# Altium PCB LED_1.PcbDoc
Units mm, origin at the board's own origin, x right, y up, seen from the top; angles counter-clockwise.
Board outline 79 x 35 mm, 2 copper layers (Top Layer, Bottom Layer); 29 components, 29 nets, 80 pads, 2 vias.
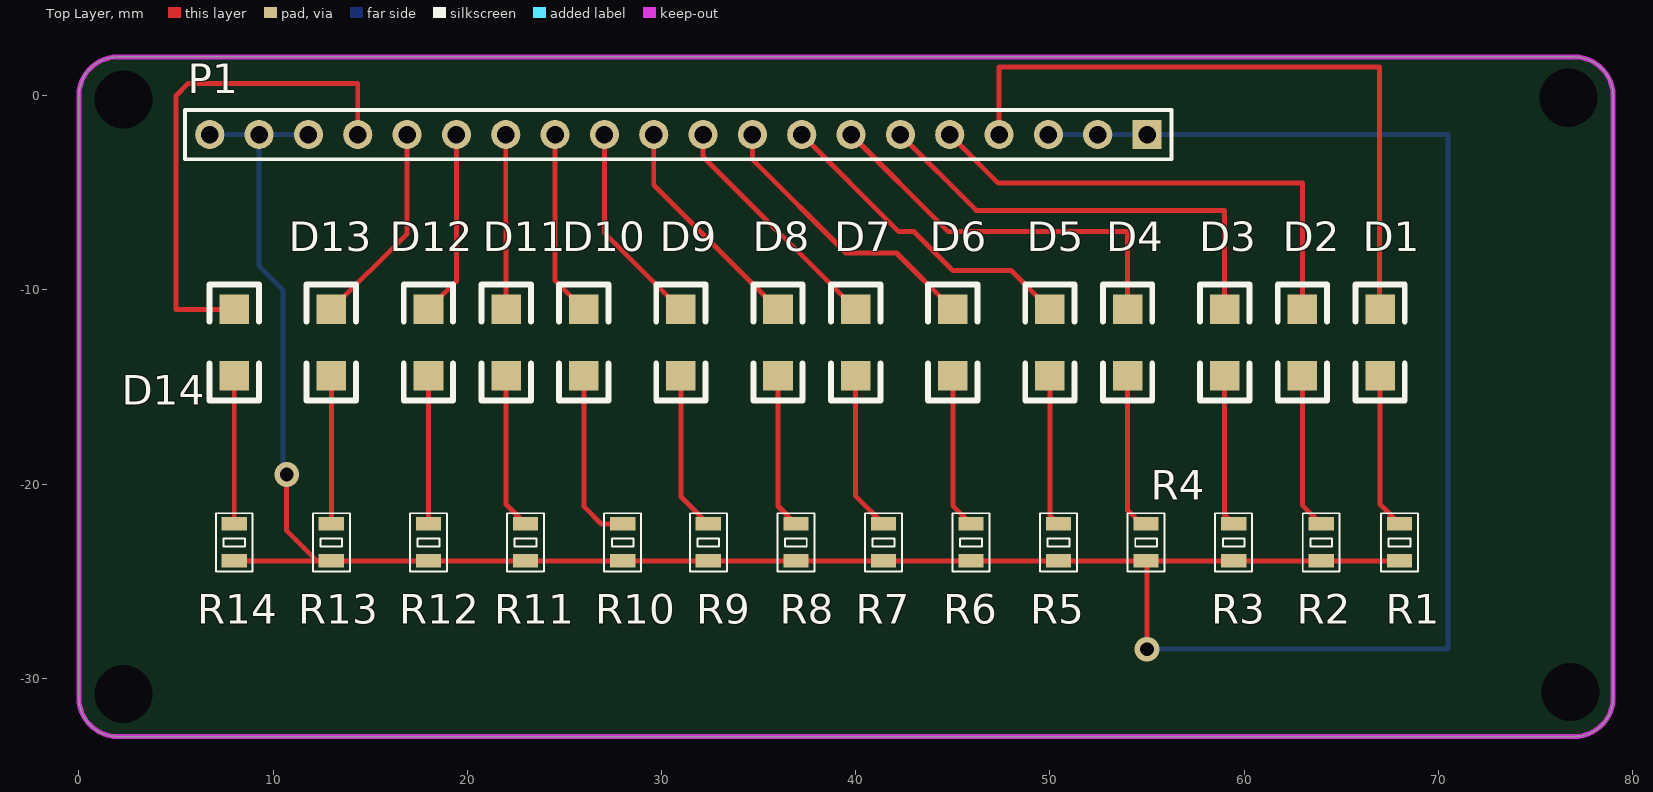
[diagram p0: Top Layer view]
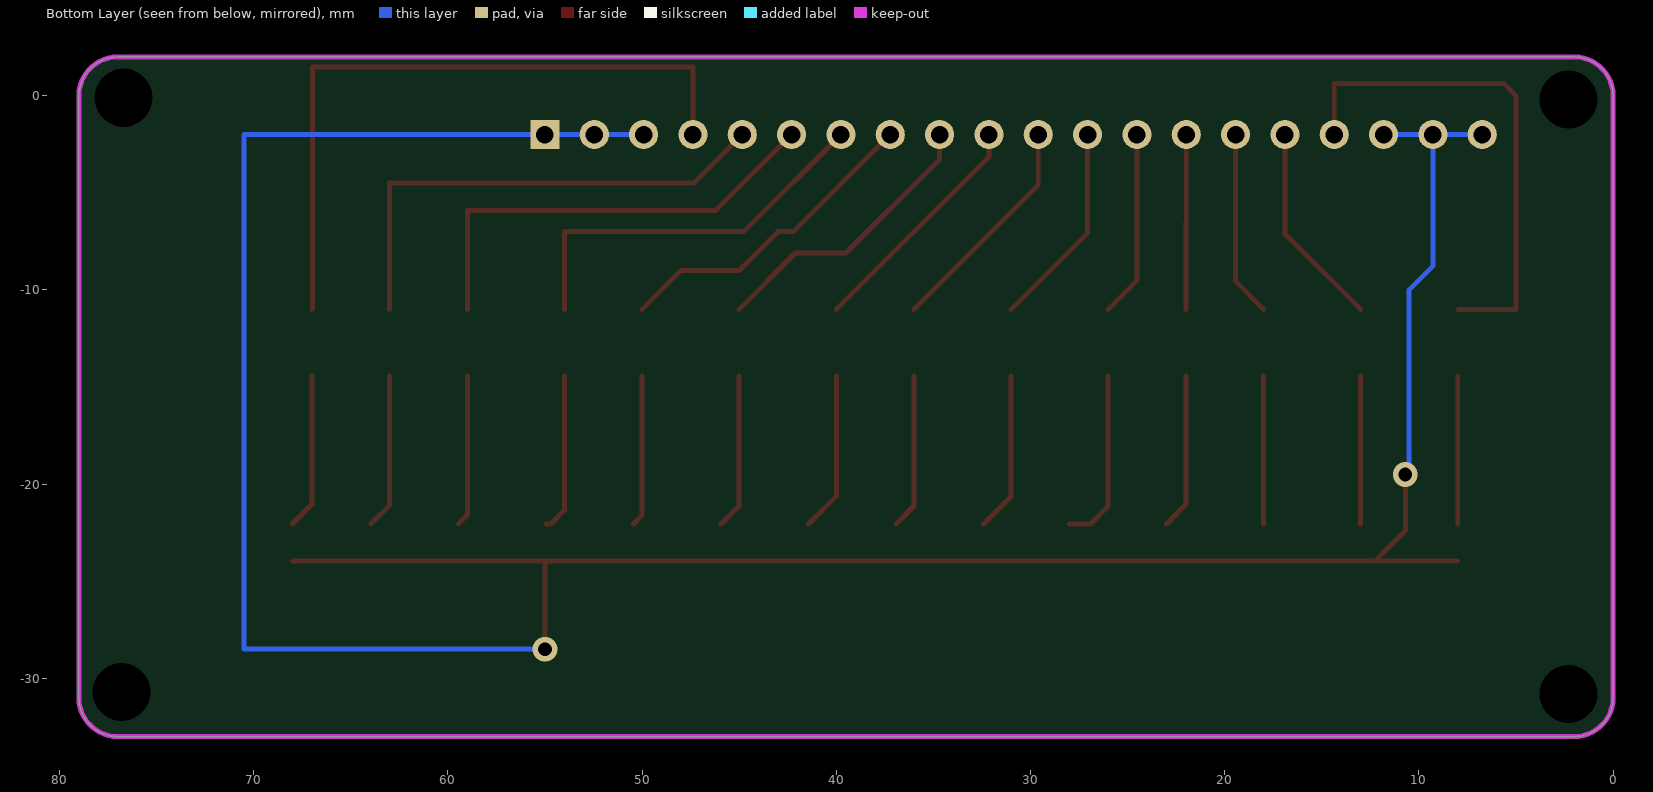
[diagram p1: Bottom Layer view, seen from below]

## Layer stack, top to bottom
Top Layer: signal copper 0.0356
Dielectric: dielectric 0.32, FR-4, Dk 4.8
Bottom Layer: signal copper 0.0356

## Board outline
0,-31 0,0 cw(c2,0) 2,2 77,2 cw(c77,0) 79,0 79,-31 cw(c77,-31) 77,-33 2,-33 cw(c2,-31)

## Design rules (kind name [scope] priority, off if disabled: settings)
Clearance [All] p1: gap=0.254
PolygonConnect [All] p1: connectstyle=Relief reliefconductorwidth=0.254 reliefentries=4 polygonreliefangle="90 Angle" airgapwidth=0.254
RoutingVias [All] p1: holewidth=0.711 width=1.27 viastyle="Through Hole" minholewidth=0.711 minwidth=1.27 maxholewidth=0.711 maxwidth=1.27
SolderMaskExpansion [All] p1: expansion=0.102
Width [All] p1: maxlimit=0.254 minlimit=0.254 preferedwidth=0.254
28 further rules are at their usual default settings.

## Components (designator, comment, footprint, x,y, rotation, side; value= is the part's Value field where it differs from the comment)
D1 "LED" 1206 67,-11 r270 top (schematic designator D3)
D2 "LED" 1206 63,-11 r270 top (schematic designator D4)
D3 "LED" 1206 59,-11 r270 top (schematic designator D5)
D4 "LED" 1206 54,-11 r270 top (schematic designator D6)
D5 "LED" 1206 50,-11 r270 top (schematic designator D7)
D6 "LED" 1206 45,-11 r270 top (schematic designator D8)
D7 "LED" 1206 40,-11 r270 top (schematic designator D9)
D8 "LED" 1206 36,-11 r270 top (schematic designator D10)
D9 "LED" 1206 31,-11 r270 top (schematic designator D11)
D10 "LED" 1206 26,-11 r270 top (schematic designator D12)
D11 "LED" 1206 22,-11 r270 top (schematic designator D13)
D12 "LED" 1206 18,-11 r270 top (schematic designator D1)
D13 "LED" 1206 13,-11 r270 top (schematic designator D2)
D14 "LED" 1206 8,-11 r270 top
P1 "Header 20" HDR1X20 55,-2 r180 top
R1 "1k" R_0805 68,-23 r270 top
R2 "1k" R_0805 63.969,-23 r270 top
R3 "1k" R_0805 59.461,-23 r270 top
R4 "1k" R_0805 54.953,-23 r270 top
R5 "1k" R_0805 50.445,-23 r270 top
R6 "1k" R_0805 45.937,-23 r270 top
R7 "1k" R_0805 41.429,-23 r270 top
R8 "1k" R_0805 36.921,-23 r270 top
R9 "1k" R_0805 32.413,-23 r270 top
R10 "1k" R_0805 28,-23 r270 top
R11 "1k" R_0805 23,-23 r270 top
R12 "1k" R_0805 18,-23 r270 top
R13 "1k" R_0805 13,-23 r270 top
R14 "1k" R_0805 8,-23 r270 top

## Footprints (in the part's own frame and the unit in brackets; to place one, negate y for a bottom-side part, rotate by r counter-clockwise, add the part's x,y. Pads: shape width x height; smd on the part's side, far side on the other; paste and mask are expansions set on the pad)
1206 [mil]
  rect 60x60 smd: 1(0,0) 2(135,0)
  silkscreen extent -50,-50 185,50
HDR1X20 [mm] "Connector; Header; 20 Position"
  rect 1.5x1.5 hole 0.9: 1(0,0)
  round 1.5 hole 0.9: 2(2.54,0) 3(5.08,0) 4(7.62,0) 5(10.16,0) 6(12.7,0) 7(15.24,0) 8(17.78,0) 9(20.32,0) 10(22.86,0) 11(25.4,0) 12(27.94,0) 13(30.48,0) 14(33.02,0) 15(35.56,0) 16(38.1,0) 17(40.64,0) 18(43.18,0) 19(45.72,0) 20(48.26,0)
  silkscreen extent -1.27,-1.27 49.53,1.27
R_0805 [mm] "Resistor Pattern"
  rect 0.7x1.3 smd: 1(-0.95,0) 2(0.95,0)
  silkscreen extent -1.5,-0.95 1.5,0.95, body extent -1,-0.6 1,0.6, height 0.5

## Part data
P1: "Header, 20-Pin"
R1 R2 R3 R4 R5 R6 R7 R8 R9 R10 R11 R12 R13 R14: library part "Res 0805", "Resistor"

## Free pads (board coordinates)
  round 0 hole 3: 0(2.3,-0.2) 1(2.3,-30.8) 2(76.8,-30.7) 3(76.7,-0.1)

## Via types
v1: diameter 1.27, hole 0.711, Top Layer to Bottom Layer, 2 vias

## Nets (pads, with @x,y where several pads share a name; then routed paths per layer and width w, separated by ;. In a path a pad name is that pad's centre, name@x,y a point inside that pad or via, vN(x,y) a via of type N, cw(c..) or ccw(c..) an arc to the next point about the centre after c; other vN are vias at no path point)
GND: P1.1 P1.2 P1.3 P1.18 P1.19 P1.20 R1.2 R2.2 R3.2 R4.2 R5.2 R6.2 R7.2 R8.2 R9.2 R10.2 R11.2 R12.2 R13.2 R14.2 | length 155.4
  Top Layer w0.254: R14.2 12.25,-23.95 ; v1(10.7,-19.5) 10.7,-22.4 12.25,-23.95 ; v1(55,-28.5) 55,-23.997 R4.2 ; R1.2 R2.2 R3.2 R4.2 ; 12.25,-23.95 R13.2 R12.2 R11.2 R10.2 R9.2 R8.2 R7.2 R6.2 R5.2 R4.2
  Bottom Layer w0.254: P1.20 P1.19 ; v1(10.7,-19.5) 10.5,-19.3 10.5,-10 9.28,-8.78 P1.19 ; P1.18 P1.19 ; P1.3 P1.2 P1.1 70.5,-2 70.5,-28.5 v1(55,-28.5)
L1: D5.1 P1.8 | length 16.5
  Top Layer w0.254: P1.8 42.22,-7 43,-7 45,-9 48,-9 D5.1
L2: D12.1 P1.15 | length 9.6
  Top Layer w0.254: D12.1 19.44,-9.56 P1.15
L3: D13.1 P1.16 | length 10.6
  Top Layer w0.254: D13.1 16.9,-7.1 P1.16
L4: D14.1 P1.17 | length 26.3
  Top Layer w0.254: D14.1 5,-11 5,0 5.64,0.64 14.36,0.64 P1.17
NetD1_2: D12.2 R12.1 | length 7.6
  Top Layer w0.254: R12.1 D12.2
NetD2_2: D13.2 R13.1 | length 7.6
  Top Layer w0.254: R13.1 D13.2
NetD3_1: D1.1 P1.4 | length 35.6
  Top Layer w0.254: P1.4 47.38,1.472 66.98,1.472 66.98,-10.98 D1.1
NetD3_2: D1.2 R1.1 | length 8
  Top Layer w0.254: D1.2 67,-21.05 R1.1
NetD4_1: D2.1 P1.5 | length 25.7
  Top Layer w0.254: P1.5 47.34,-4.5 63,-4.5 D2.1
NetD4_2: D2.2 R2.1 | length 8
  Top Layer w0.254: D2.2 63,-21.081 R2.1
NetD5_1: D3.1 P1.6 | length 23.4
  Top Layer w0.254: P1.6 46.2,-5.9 59,-5.9 D3.1
NetD5_2: D3.2 R3.1 | length 7.8
  Top Layer w0.254: D3.2 59,-21.589 R3.1
NetD6_1: D4.1 P1.7 | length 20.8
  Top Layer w0.254: P1.7 44.76,-7 54,-7 D4.1 D4.1@54,-10.54
NetD6_2: D4.2 R4.1 | length 8.2
  Top Layer w0.254: D4.2 54,-21.35 54.7,-22.05 R4.1
NetD7_2: D5.2 R5.1 | length 7.8
  Top Layer w0.254: D5.2 50,-21.605 R5.1
NetD8_1: D6.1 P1.9 | length 14.8
  Top Layer w0.254: P1.9 34.68,-3.28 39.5,-8.1 42.1,-8.1 D6.1
NetD8_2: D6.2 R6.1 | length 8
  Top Layer w0.254: D6.2 45,-21.113 R6.1
NetD9_1: D7.1 P1.10 | length 12.3
  Top Layer w0.254: P1.10 32.14,-3.14 D7.1
NetD9_2: D7.2 R7.1 | length 8.2
  Top Layer w0.254: D7.2 40,-20.621 R7.1
NetD10_1: D8.1 P1.11 | length 11.7
  Top Layer w0.254: P1.11 29.6,-4.6 D8.1
NetD10_2: D8.2 R8.1 | length 8
  Top Layer w0.254: D8.2 36,-21.129 R8.1
NetD11_1: D9.1 P1.12 | length 10.6
  Top Layer w0.254: P1.12 27.06,-7.06 D9.1
NetD11_2: D9.2 R9.1 | length 8.2
  Top Layer w0.254: D9.2 31,-20.637 R9.1
NetD12_1: D10.1 P1.13 | length 9.6
  Top Layer w0.254: P1.13 24.52,-9.52 D10.1
NetD12_2: D10.2 R10.1 | length 9.1
  Top Layer w0.254: D10.2 26,-21.144 26.906,-22.05 R10.1
NetD13_1: D11.1 P1.14 | length 9
  Top Layer w0.254: P1.14 21.98,-6.494 22,-6.514 D11.1
NetD13_2: D11.2 R11.1 | length 8
  Top Layer w0.254: D11.2 22,-21.05 R11.1
NetD14_2: D14.2 R14.1 | length 7.6
  Top Layer w0.254: R14.1 D14.2

## Keep-outs
Keep-Out Layer:
  the board outline again, w0.254